# EAGLE board schematic (EAGLE 8.0.1)
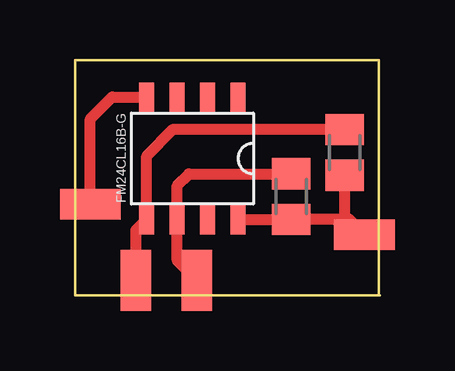
[diagram p0: board, top side]

Size 12.7 x 9.83 mm. Coordinates in mm from the lower left corner, seen from the top.
Outline: 0,0 12.68,0 12.68,9.83 0,9.83
Outline: 0,9.83 0,9.83
Outline: 0,9.83 0,0
Outline: 0,0 12.68,0
Outline: 12.7,0 12.68,0
Outline: 12.68,0 12.68,9.83 0,9.83
Copper layers (1*16): Top 0.035mm / dielectric 1.5mm / Bottom 0.035mm
Design rules "default": minimum track width 10mil, minimum drill 24mil, track to track 8mil, track to pad 8mil, pad to pad 8mil, via to via 8mil, smd to smd 8mil, copper to edge 40mil, drill to drill 8mil, minimum pad ring 10mil, minimum via ring 8mil, stop-mask expansion 4mil, vias tented up to drill 0mil, thermal gap 10mil

## Footprints (pad centres in the part's own frame; a part is rotated, then mirrored left to right if it is on the bottom)
SMD1,27-2,54 = smd 1.27 x 2.54: 1 0,0
M0805 = smd 1.3 x 1.6: 1 -0.95,0; 2 0.95,0
FM24CL16B-G = smd 1.27 x 0.635: 1 -1.27,2.54; 2 -1.27,1.27; 3 -1.27,0; 4 -1.27,-1.27; 5 3.81,-1.27; 6 3.81,0; 7 3.81,1.27; 8 3.81,2.54

## Placement (x,y rotation side)
GND  [SMD1,27-2,54]  0.64,3.81 90 top
R1  [M0805]  9.02,4.13 270 top
R2  [M0805]  11.24,5.97 270 top
SCL  [SMD1,27-2,54]  5.08,0.64 0 top
SDA  [SMD1,27-2,54]  2.54,0.64 0 top
U$1  FM24CL16B-G  [FM24CL16B-G]  4.25,6.99 270 top
VCC  [SMD1,27-2,54]  12.06,2.54 90 top

## Library data of the parts
GND SCL SDA VCC = wirepad
R1 R2 = adafruit
U$1 = FM24CL16B-G_fram

## Nets
+3V3: R1.2 R2.2 U$1.8 VCC.1
GND: GND.1 U$1.4
N$4: R1.1 SCL.1 U$1.6
N$5: R2.1 SDA.1 U$1.5

## Tracks (layer width: path | path; a pad name or v marks a point on that pad's centre or on a via)
+3V3
  Top 0.457: U$1.8 R1.2 11.43,3.18 | 11.43,3.18 VCC.1 | R2.2 11.24,3.37 11.43,3.18
GND
  Top 0.457: GND.1 0.64,7.37 1.55,8.28 2.96,8.28 U$1.4
N$4
  Top 0.457: SCL.1 4.25,1.46 U$1.6 4.25,4.58 4.75,5.08 R1.1
N$5
  Top 0.457: SDA.1 2.54,2.73 U$1.5 2.98,5.83 4.09,6.93 11.22,6.93 R2.1